# Allegro board ENACHE_PCB.brd
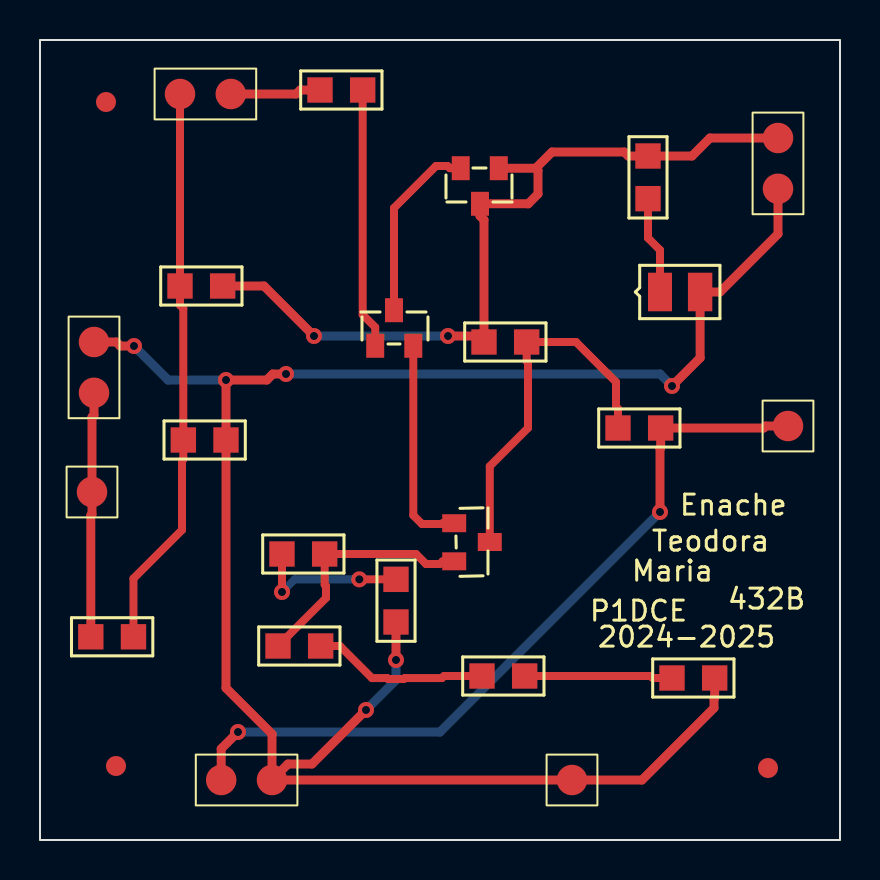
[diagram p0: board, top side]
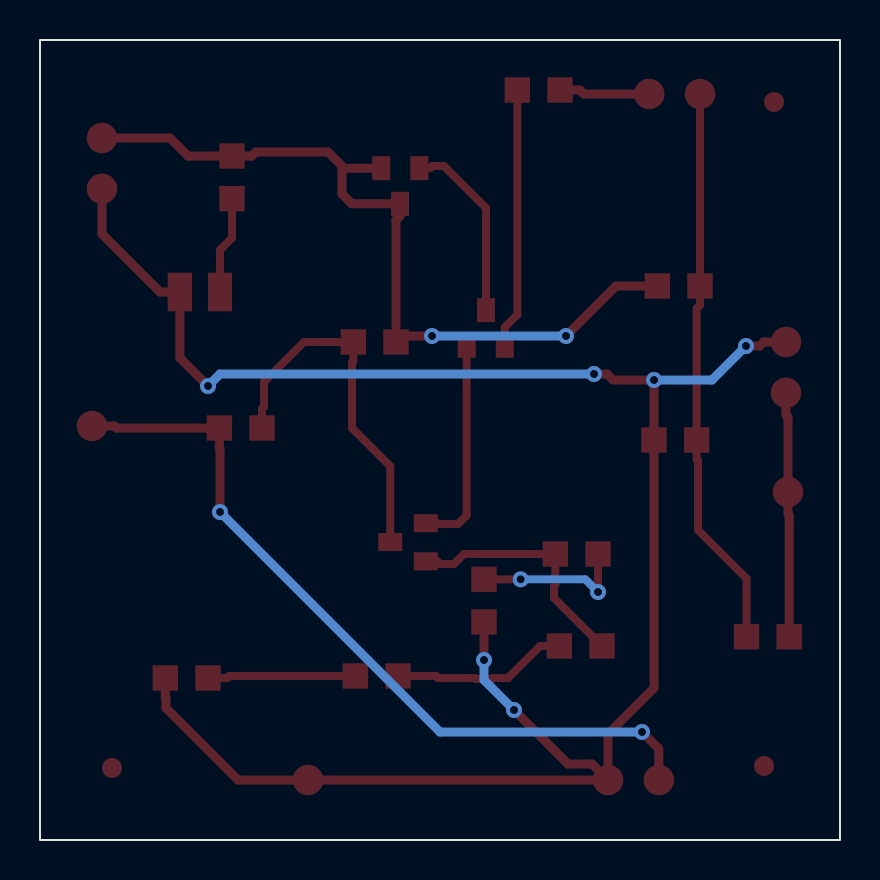
[diagram p1: board, bottom side, seen from below]

Outline 40 x 40 mm; copper layers: TOP, BOTTOM. Coordinates in mm from the lower left corner of the outline.
Outline path: rectangle 0,0 40,40

## Design rules (mm)
nets with their own width: min track width 0.4; nets N109166 N109282 N109344 N109466 N109572 N109644 N109650 N109680 N111912 N1093960
nets with their own width: min track width 0.45; nets GND VCC VDC VIN VOUT

## Placement (name value [footprint] x y rotation side)
C1  10u  [SMC0805]  2.54 10.16 0 top
C2  10u  [SMC0805]  28.9 20.6 0 top
D1  LG_T656-TYP  [SMD080512]  31 27.4 0 top
J1  VIN  [JUMPER2]  2.7 24.9 270 top
J2  VCC  [JUMPER2]  36.9 35.1 270 top
J3  VDC  [JUMPER2]  7 37.3 0 top
J4  GND  [JUMPER1]  26.6 3 0 top
J5  VOUT  [JUMPER2]  11.6 3 180 top
J6  VIN  [JUMPER1]  2.6 17.4 0 top
J7  VOUT  [JUMPER1]  37.4 20.7 0 top
NOREF  -  []  0 40 0 top
NOREF#2  -  [unnamed#2]  3.3 36.9 0 top
NOREF#3  -  [unnamed#2]  36.4 3.6 0 top
NOREF#4  -  []  40 0 90 top
NOREF#5  -  [unnamed#2]  3.8 3.7 0 top
Q4  BC817-25  [SOT23]  21.6 14.9 0 top
Q7  BC817-25  [SOT23]  17.7 25.6 90 top
Q8  BC817-25  [SOT23]  22 32.7 270 top
R1  100  [SMR0805]  9.3 20 180 top
R3  680  [SMR0805]  22.2 24.9 0 top
R22  22  [SMR0805]  14 37.5 0 top
R23  1k  [SMR0805]  7 27.7 0 top
R25  10  [SMR0805]  12.1 14.3 0 top
R26  4.7  [SMR0805]  11.9 9.7 0 top
R27  1  [SMR0805]  22.1 8.2 0 top
R28  1  [SMR0805]  31.6 8.1 0 top
R29  4.7  [SMR0805]  17.8 10.9 90 top
R30  330  [SMR0805]  30.4 34.2 270 top

## Library data of the parts
C1 C2 = C
D1 = LG_T656-TYP
J1-J3 J5 = CON2: User Part Number: ***
J4 J6 J7 = CON1: User Part Number: ***
Q4 Q7 Q8 = BC817-25
R1 R3 R22 R23 R25-R30 = R

## Footprints (pads in the part's own frame, mm; a bottom-side part is the same pattern mirrored in y, then rotated)
JUMPER1
  round 1.524 smd: 1(0,0)
JUMPER2
  round 1.524 smd: 1(0,0) 2(2.54,0)
SMC0805
  rect 1.27x1.27 smd: 1(0,0) 2(2.134,0)
SMD080512
  rect 1.2x1.93 smd: 1(0,0)
  rect 1.219x1.93 smd: 2(2.007,0)
SMR0805
  rect 1.27x1.27 smd: 1(0,0) 2(2.134,0)
SOT23
  rect 1.2x0.9 smd: 1(-0.889,0.94) 2(-0.889,-0.965) 3(0.889,0)
unnamed#2
  round 1 smd: (0,0)

## Nets
GND: D1.2 J1.1 J2.2 J4.1 J5.1 R1.1 R28.2 R29.1
VCC: J2.1 Q8.1 Q8.3 R3.1 R23.2 R30.1
VIN: C1.1 J1.2 J6.1
VDC: J3.2 R22.1
VOUT: C2.2 J5.2 J7.1
N109166: C1.2 J3.1 R1.2 R23.1
N109282: C2.1 Q4.3 R3.2
N109344: Q7.3 Q8.2(E)
N109466: Q4.1 Q7.2(E)
N109572: Q4.2(E) R25.2 R26.1
N109644: R26.2 R27.1
N109650: R27.2 R28.1
N109680: R25.1 R29.2
N111912: D1.1 R30.2
N1093960: Q7.1 R22.2

## Via types
v1: diameter 0.8, hole 0.4, TOP to BOTTOM, 12 vias

## Routing (per net, layer and track width the routed paths; a pad name or vN(x,y) marks a point on that pad's centre or on a via; arc(x,y) is an arc through that point)
GND: length 99.9
  TOP w0.45: J5.1 11.6,5.3 9.3,7.6 R1.1 v1(9.3,23) 11.34,23 11.64,23.3 v1(12.3,23.3) ; J5.1 J4.1 30.1,3 33.7,6.6 33.7,7.08 33.73,7.11 R28.2 ; J5.1 12.4,3.8 13.6,3.8 v1(16.3,6.5) ; v1(31.6,22.7) 33.01,24.11 D1.2 34,27.4 36.9,30.3 J2.2 ; v1(4.7,24.7) 4.01,24.7 3.81,24.9 J1.1 ; R29.1 v1(17.8,9)
  BOTTOM w0.45: v1(31.6,22.7) 31,23.3 v1(12.3,23.3) ; v1(4.7,24.7) 6.4,23 v1(9.3,23) ; v1(17.8,9) 17.8,8 v1(16.3,6.5)
VCC: length 40.4
  TOP w0.45: 22.94,33.55 22.94,33.59 24.79,33.59 ; v1(13.7,25.2) 11.2,27.7 R23.2 ; J2.1 33.5,35.1 32.6,34.2 R30.1 29.41,34.2 29.21,34.4 25.6,34.4 24.79,33.59 ; 24.79,33.59 24.9,33.48 24.9,32.3 24.41,31.81 Q8.3 22,31.2 22.2,31 R3.1 21.9,25.2 v1(20.4,25.2)
  BOTTOM w0.45: v1(13.7,25.2) v1(20.4,25.2)
VIN: length 12.3
  TOP w0.45: J1.2 2.7,21.25 2.6,21.15 J6.1 2.6,16.29 2.54,16.23 C1.1
VDC: length 4.5
  TOP w0.45: J3.2 12.81,37.3 13.01,37.5 R22.1
VOUT: length 39
  TOP w0.45: J7.1 36.29,20.7 36.19,20.6 C2.2 31.03,19.61 31,19.58 v1(31,16.4) ; J5.2 9.06,4.56 v1(9.9,5.4)
  BOTTOM w0.45: v1(9.9,5.4) 20,5.4 v1(31,16.4)
N109166: length 28.2
  TOP w0.4: J3.1 R23.1 7,26.74 7.17,26.57 R1.2 7.17,19.04 7.1,18.97 7.1,15.5 4.67,13.07 C1.2
N109282: length 18.5
  TOP w0.4: C2.1 28.9,21.56 28.8,21.66 28.8,22.9 26.8,24.9 R3.2 24.33,23.94 24.4,23.87 24.4,20.6 22.49,18.69 Q4.3
N109344: length 9.4
  TOP w0.4: Q7.3 17.7,31.6 19.8,33.7 20.38,33.7 20.49,33.59 21.03,33.59
N109466: length 10.7
  TOP w0.4: Q4.1 20.13,15.84 20.09,15.8 19.1,15.8 18.67,16.23 Q7.2
N109572: length 12.4
  TOP w0.4: Q4.2 20.13,13.93 20,13.8 19.3,13.8 18.8,14.3 R25.2 14.23,12.77 14.3,12.7 14.3,12.1 R26.1
N109644: length 8.8
  TOP w0.4: R27.1 20.2,8.2 20.1,8.1 18.24,8.1 18.19,8.05 17.41,8.05 17.36,8.1 16.6,8.1 15,9.7 R26.2
N109650: length 7.4
  TOP w0.4: R28.1 30.64,8.1 30.54,8.2 R27.2
N109680: length 7.9
  TOP w0.4: v1(12.1,12.4) R25.1 ; R29.2 v1(15.97,13.03)
  BOTTOM w0.4: v1(12.1,12.4) 12.73,13.03 v1(15.97,13.03)
N111912: length 4.9
  TOP w0.4: R30.2 30.4,30.1 31,29.5 D1.1
N1093960: length 13
  TOP w0.4: R22.2 16.13,26.26 16.76,25.64 Q7.1

## Text on the board
Ref Des/Silkscreen Top: P1DCE | 2024-2025 | Maria | Teodora | Enache | 432B
XSECTION_CHART: *  SURFACE | L1 TOP CONDUCTOR | *  DIELECTRIC | L2 BOTTOM CONDUCTOR | DESIGN CROSS SECTION CHART | ___________________________ | TOTAL THICKNESS 1.6 MM | 1-2
DIMENSION: FIGURE | FINISHED_SIZE | 0.4 | DRILL CHART: TOP to BOTTOM | ALL UNITS ARE IN MILLIMETERS | PLATED | QTY | 12
